# Altium PCB 8088NoteBook2.PcbDoc (part 1 of 2)
Units mm, origin at the board's own origin, x right, y up, seen from the top; angles counter-clockwise.
Board outline 60 x 75.5 mm, 4 copper layers (Top Layer, MidLayer1, GND, Bottom Layer); 109 components, 230 nets, 889 pads, 406 vias.
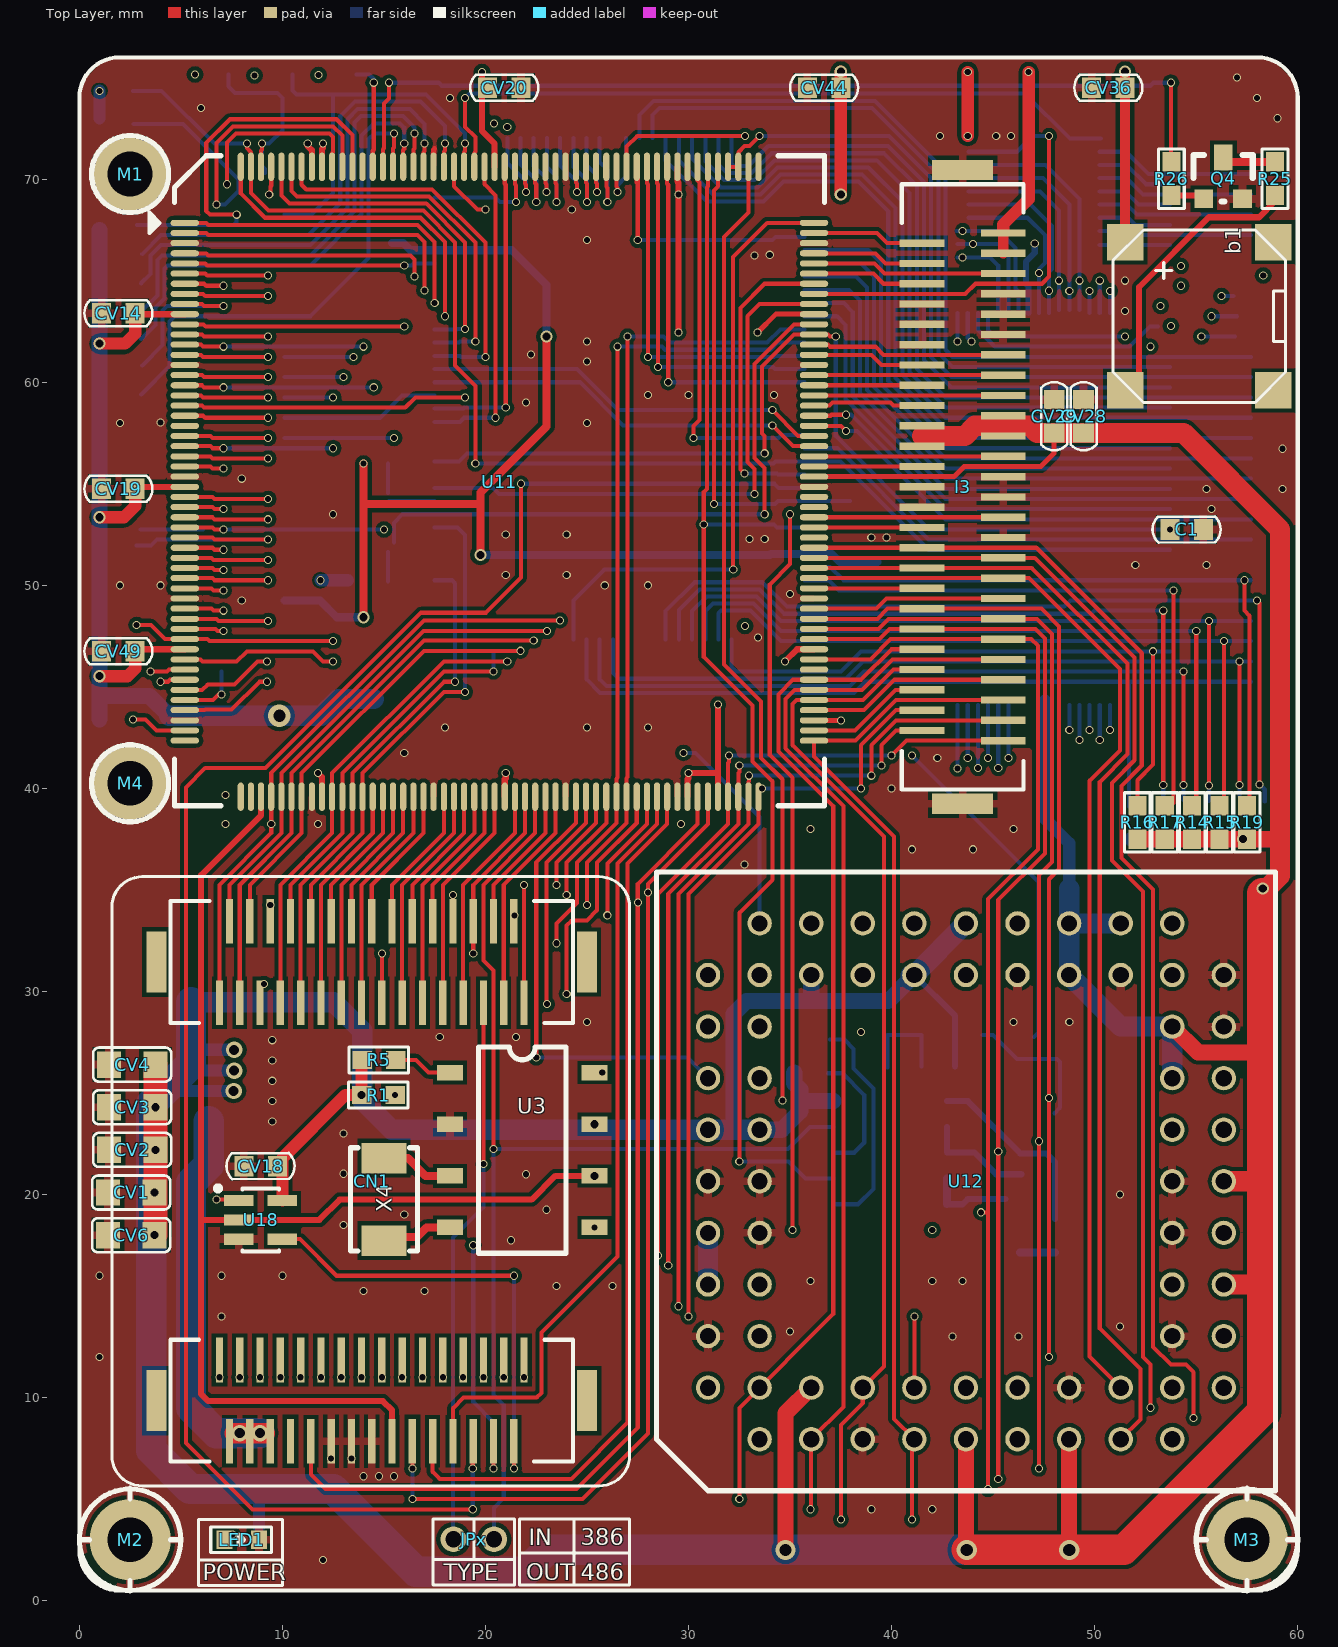
[diagram p0: Top Layer view]
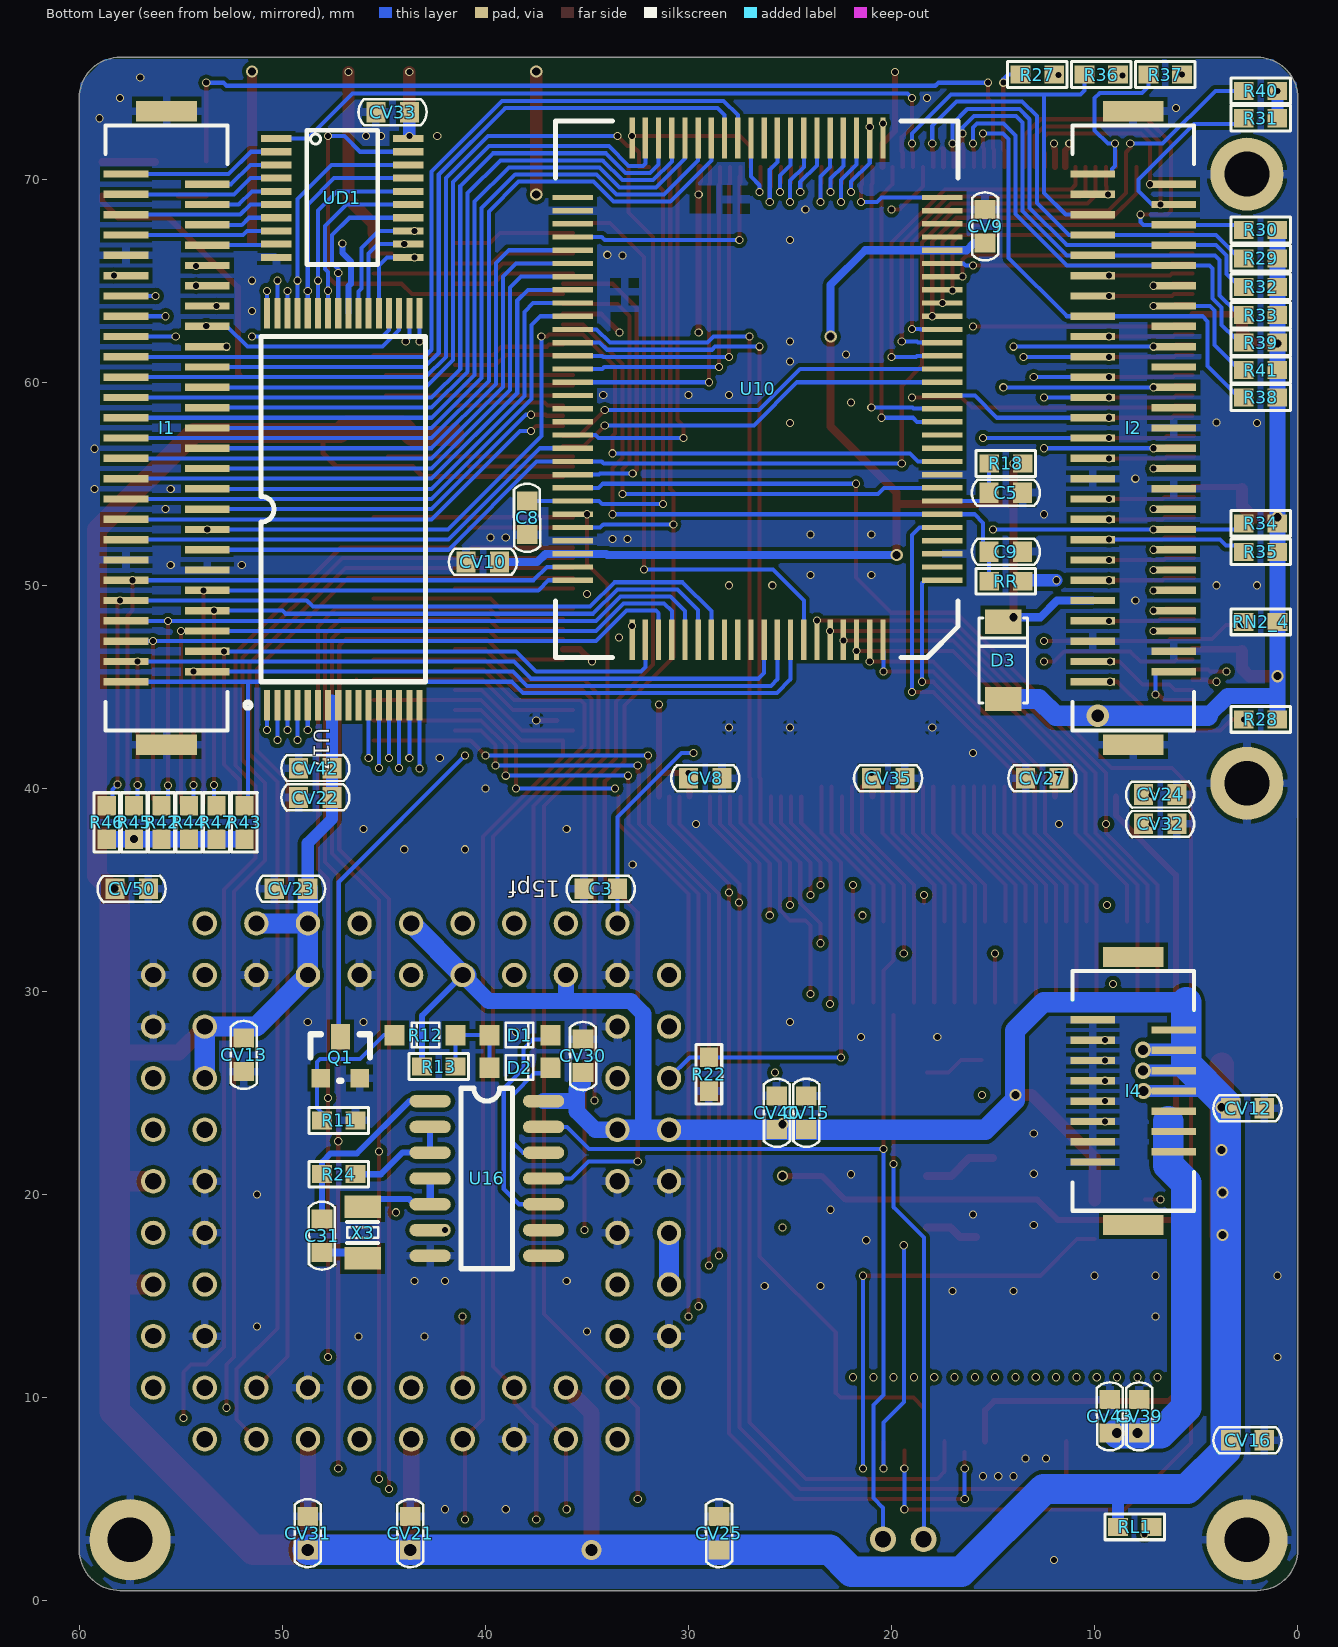
[diagram p1: Bottom Layer view, seen from below]
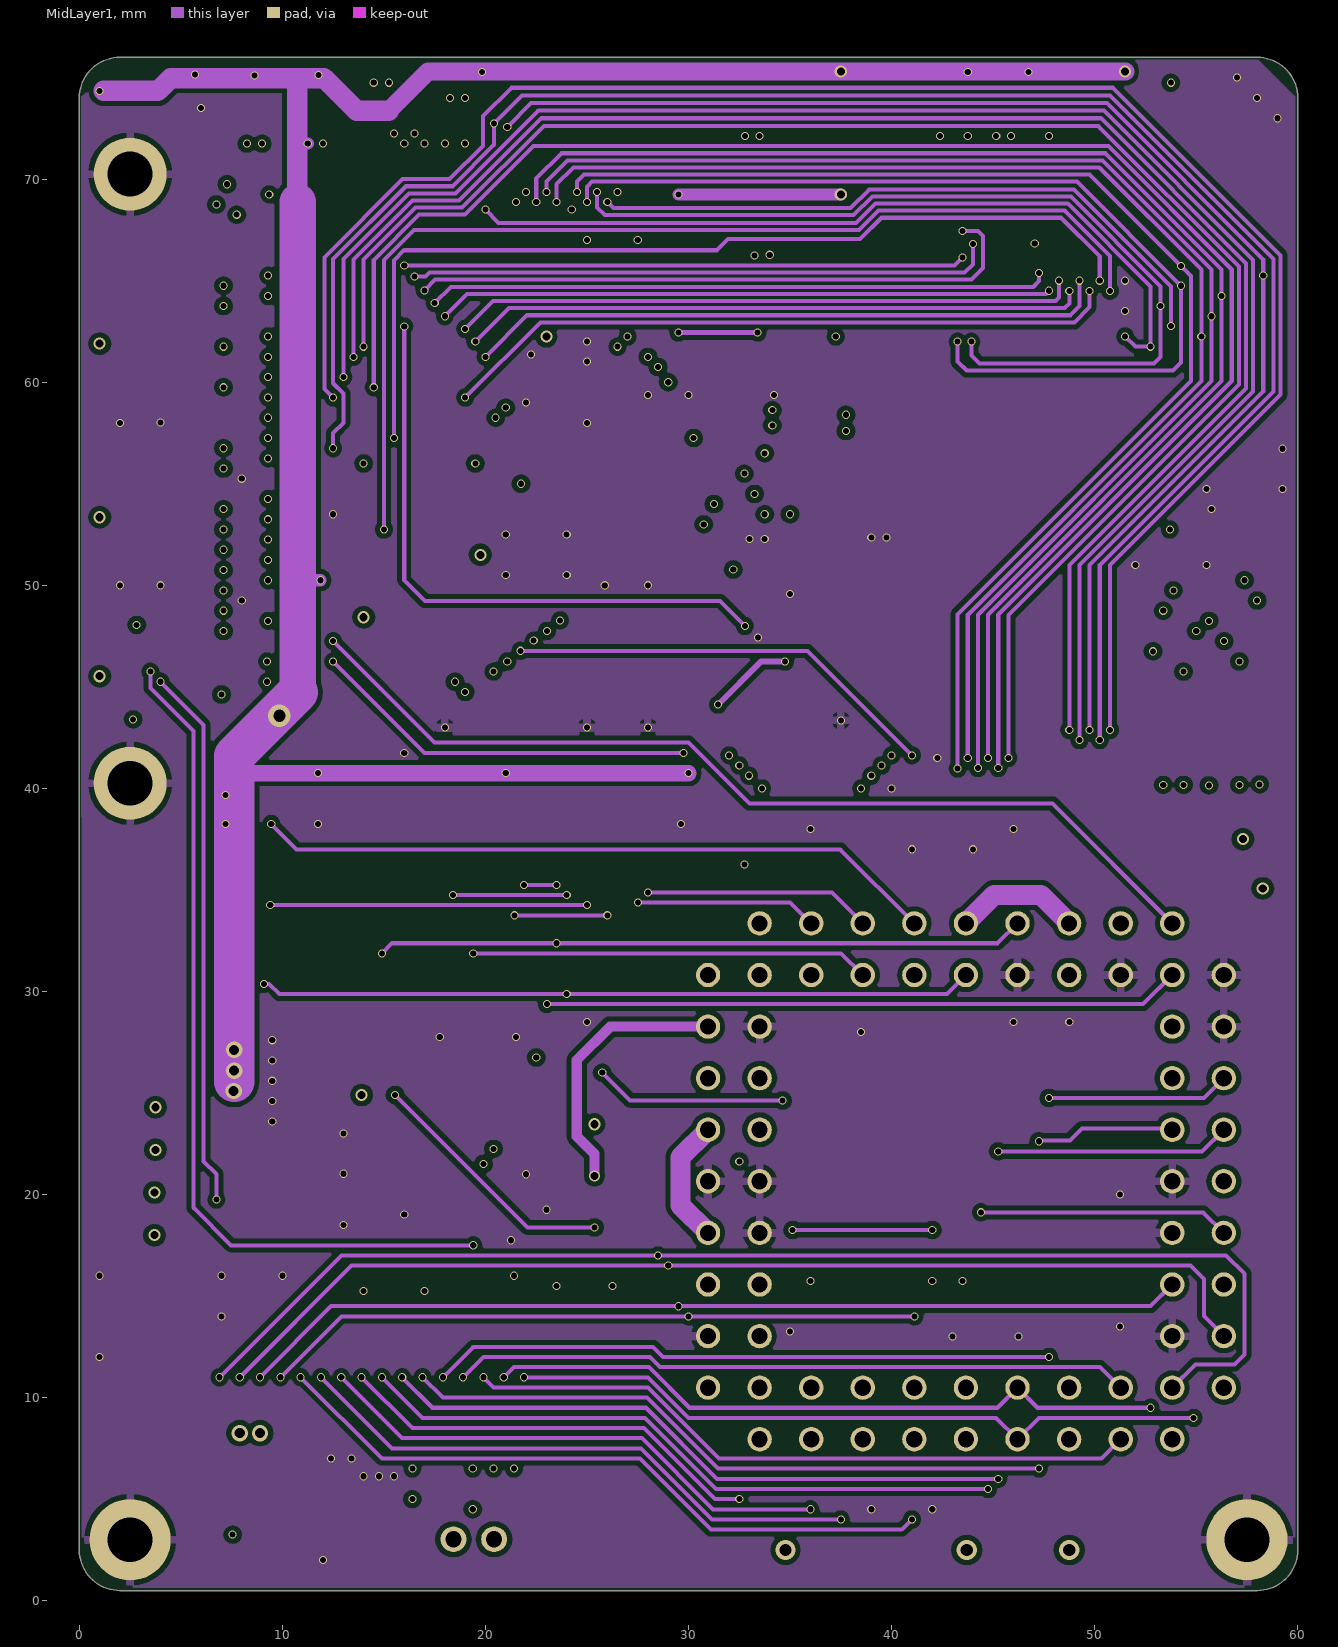
[diagram p2: MidLayer1]
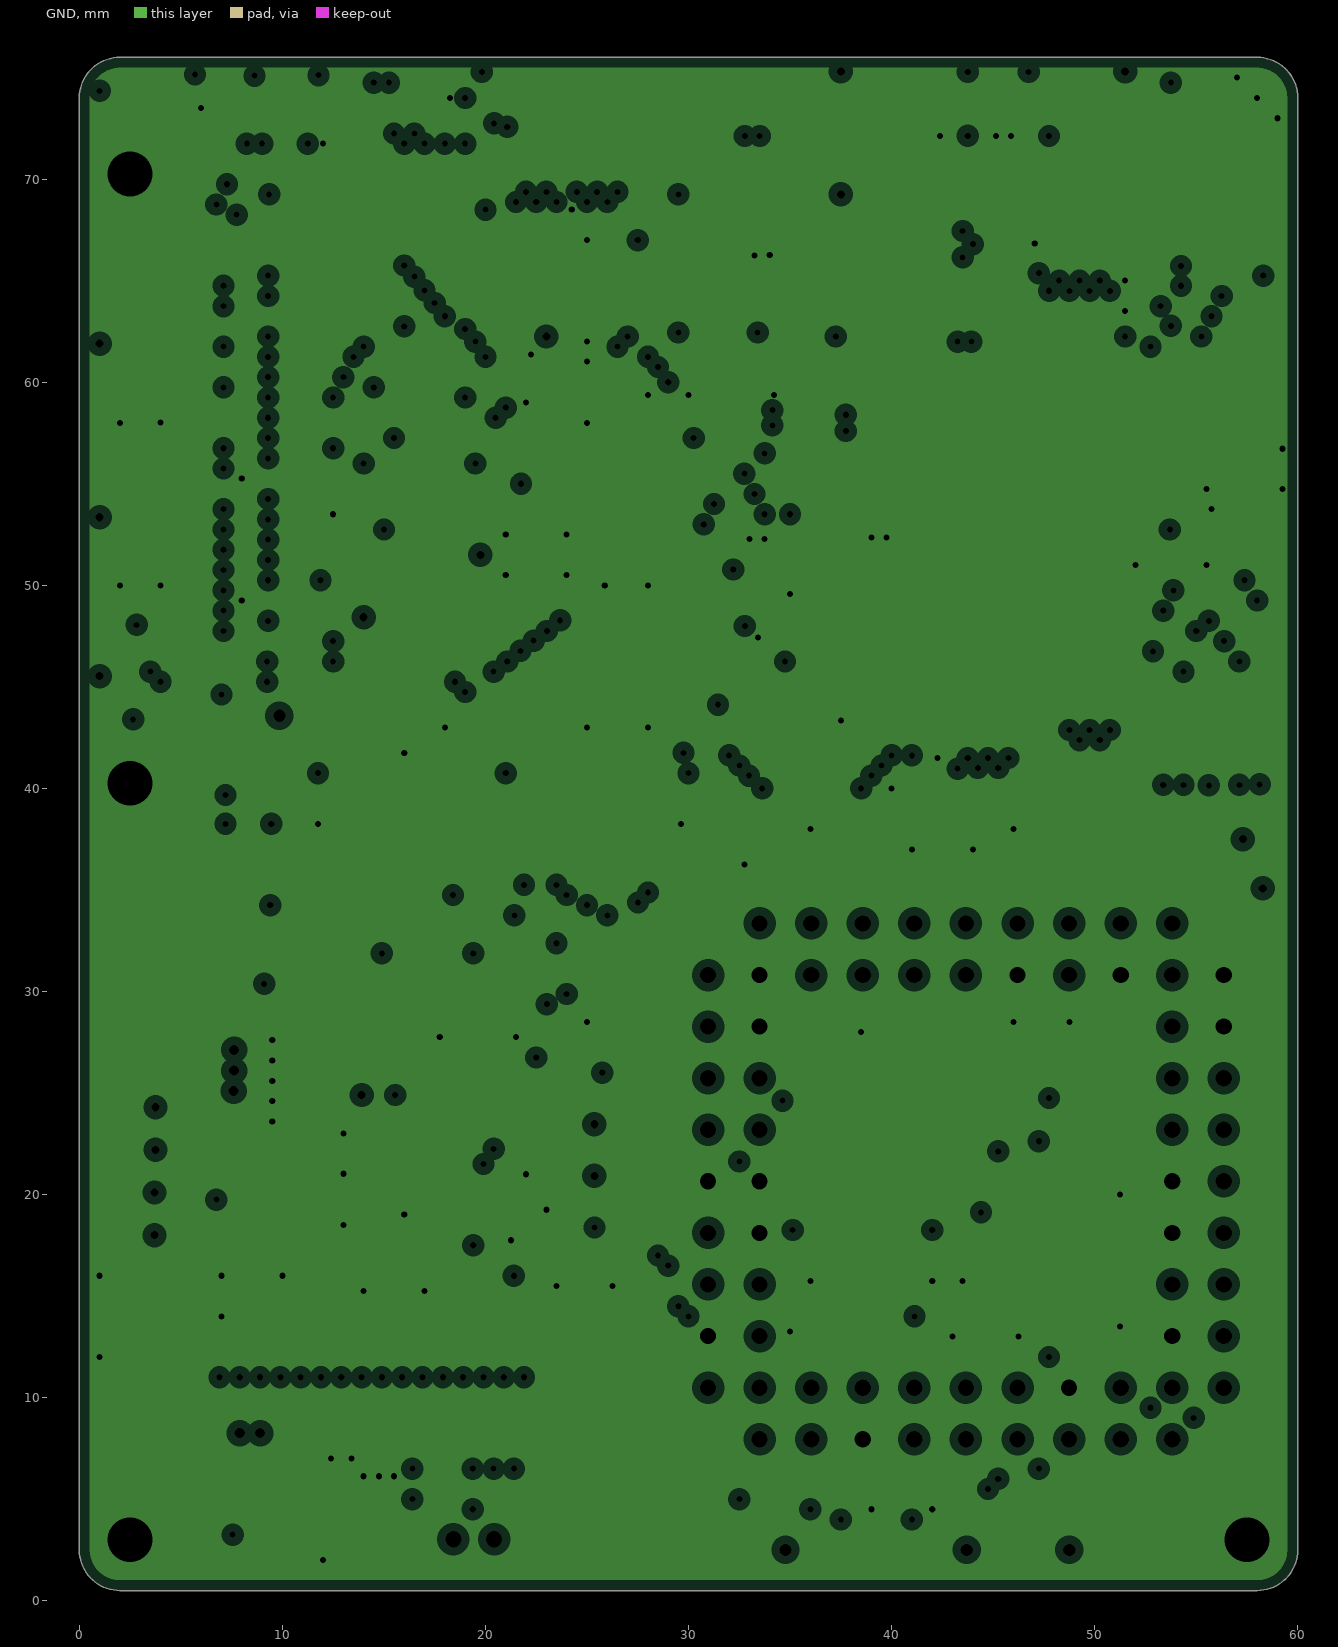
[diagram p3: GND, clearances drawn from the general rule]

## Layer stack, top to bottom
Top Layer: signal copper 0.0356
Dielectric: core 0.32, FR-4, Dk 4.8
MidLayer1: signal copper 0.0356
Dielectric: prepreg 0.32, FR-4, Dk 4.8
GND: plane copper 0.0356, net GND
Dielectric: core 0.32, FR-4, Dk 4.8
Bottom Layer: signal copper 0.0356

## Board outline
0,2.5 ccw(c2,2.5) 2,0.5 58,0.5 ccw(c58,2.5) 60,2.5 60,74 ccw(c58,74) 58,76 2,76 ccw(c2,74) 0,74

## Design rules (kind name [scope] priority, off if disabled: settings)
Clearance [All] p1: gap=0.15
ComponentClearance [All] p1: gap=0.254 collisioncheckmode=3 verticalgap=0.254
HoleSize [All] p1: absolutevalues=TRUE maxlimit=10 minlimit=0.3 maxpercent=80.000 minpercent=20.000
PlaneClearance [All] p1: clearance=0.4
PlaneConnect [All] p1: planeconnectstyle=Direct reliefexpansion=0.508 reliefentries=4 reliefconductorwidth=0.254 reliefairgap=0.254
PolygonConnect [All] p1: connectstyle=Relief reliefconductorwidth=0.4 reliefentries=4 polygonreliefangle="90 Angle"
RoutingVias [All] p1: holewidth=0.3 width=0.4 viastyle="Through Hole" minholewidth=0.3 minwidth=0.4 maxholewidth=5 maxwidth=5
SolderMaskExpansion [All] p1: expansion=0.102
TestPointUsage [All] p1: valid=0 allowmultiple=FALSE
Testpoint [All] p1: side=15 testpointundercomponent=TRUE minsize=1.016 maxsize=2.54 preferedsize=1.524 minholesize=0 maxholesize=1.016 preferedholesize=0.813 testpointgrid=0.025 style=1023 order=0123456789
Width [All] p1: maxlimit=5 minlimit=0.2 preferedwidth=0.254 toplayer_prefwidth=0.2 midlayer1_prefwidth=0.2 bottomlayer_prefwidth=0.2 minimp=50.000000 maximp=50.000000 favimp=50.000000
15 further rules are at their usual default settings.

## Components (designator, comment, footprint, x,y, rotation, side; value= is the part's Value field where it differs from the comment)
b1 "BELL" BELL_8530 59.4,67.5 r180 top
C1 "1000pf" C0603 53.7,52.75 r0 top
C3 "15pf" C0603 33.5,35.05 r0 bottom
C5 "47000pf" C0603 13.55,54.55 r0 bottom
C8 "220pf" C0603 37.95,54.15 r270 bottom
C9 "10uf" C0603 15.2,51.65 r180 bottom
C31 "5pf" C0603 48.05,18.8 r270 bottom
CN1 "386SX-1.1" MY-386SX1 21.9,29.45 r180 top
CV1 "CAP" C0805 3.7,20.1 r180 top
CV2 "CAP" C0805 3.75,22.2 r180 top
CV3 "CAP" C0805 3.75,24.3 r180 top
CV4 "CAP" C0805 3.75,26.4 r180 top
CV6 "CAP" C0805 3.7,18 r180 top
CV8 "0.1uf" C0603 30,40.5 r180 bottom
CV9 "0.1uf" C0603 15.4,66.85 r90 bottom
CV10 "0.1uf" C0603 39.3,51.15 r0 bottom
CV12 "0.1uf" C0603 3.3,24.25 r180 bottom
CV13 "0.1uf" C0603 51.9,27.7 r270 bottom
CV14 "0.1uf" C0603 2.75,63.4 r180 top
CV15 "0.1uf" C0603 24.2,23.2 r90 bottom
CV16 "0.1uf" C0603 3.3,7.9 r180 bottom
CV18 "0.1uf" C0603 9.75,21.4 r180 top
CV19 "0.1uf" C0603 2.75,54.75 r180 top
CV20 "0.1uf" C0603 20.1,74.5 r0 top
CV21 "0.1uf" C0603 43.7,2.5 r90 bottom
CV22 "0.1uf" C0603 47.55,39.55 r0 bottom
CV23 "0.1uf" C0603 48.75,35.05 r0 bottom
CV24 "0.1uf" C0603 7.6,39.7 r180 bottom
CV25 "0.1uf" C0603 28.5,2.5 r90 bottom
CV27 "0.1uf" C0603 11.75,40.5 r0 bottom
CV28 "0.1uf" C0603 49.45,57.5 r90 top
CV29 "0.1uf" C0603 48,57.5 r90 top
CV30 "0.1uf" C0603 35.2,26 r90 bottom
CV31 "0.1uf" C0603 48.75,2.5 r90 bottom
CV32 "0.1uf" C0603 7.6,38.25 r180 bottom
CV33 "0.1uf" C0603 43.75,73.3 r0 bottom
CV35 "0.1uf" C0603 21,40.5 r180 bottom
CV36 "0.1uf" C0603 51.5,74.5 r180 top
CV39 "0.1uf" C0603 7.8,8.25 r90 bottom
CV40 "0.1uf" C0603 25.65,23.2 r90 bottom
CV42 "0.1uf" C0603 47.55,41 r0 bottom
CV43 "0.1uf" C0603 9.25,8.25 r90 bottom
CV44 "0.1uf" C0603 37.5,74.5 r180 top
CV49 "0.1uf" C0603 2.75,46.75 r180 top
CV50 "0.1uf" C0603 58.25,35.05 r180 bottom
D1 "DIODE1" SOD323 39.8,27.85 r180 bottom
D2 "DIODE1" SOD323 39.8,26.25 r180 bottom
D3 "DIODE1" SMx 14.5,44 r90 bottom
I1 "CON51P" BTB1.0-51P-B 57.7,70.25 r270 bottom
I2 "CON51P" BTB1.0-51P-B 10.1,70.25 r270 bottom
I3 "CON51P" BTB1.0-51P-b 45.5,42.35 r90 top
I4 "CON15P" BTB1.0-15P-B 10.1,28.6 r270 bottom
JPx "JP" SIP2(2.0) 20.425,3.025 r180 top
LED1 "POWER" LED0603 7.15,3 r0 top
M1 "CON1" M2A 2.5,70.25 r0 top
M2 "CON1" MY-M2 2.5,3 r0 top
M3 "CON1" MY-M2 57.5,3 r0 top
M4 "CON1" M2A 2.5,40.25 r0 top
Q1 "NPN-Y1" SOT23 47.15,26.75 r180 bottom
Q4 "NPN" SOT23 56.325,70.05 r0 top
R1 "10k" R0603 15.55,24.9 r180 top
R5 "10k" R0603 15.575,26.625 r180 top
R11 "2.2k" R0603 46.4,23.65 r0 bottom
R12 "DIODE1" SOD323 41.475,27.85 r0 bottom
R13 "4.7k" R0603 43.125,26.3 r180 bottom
R14 "4.7k" R0603 54.8,37.5 r90 top
R15 "4.7k" R0603 56.15,37.5 r90 top
R16 "4.7k" R0603 52.1,37.5 r90 top
R17 "4.7k" R0603 53.45,37.5 r90 top
R18 "1k" R0603 15.2,56 r180 bottom
R19 "4.7k" R0603 57.5,37.5 r90 top
R22 "4.7k" R0603 29,25.1 r90 bottom
R24 "1M" R0603 48.05,21 r180 bottom
R25 "33" R0603 58.875,70.85 r270 top
R26 "4.7k" R0603 53.775,69.2 r90 top
R27 "4.7k" R0603 12,75.15 r0 bottom
R28 "4.7k" R0603 1,43.4 r0 bottom
R29 "4.7k" R0603 1,66.1 r0 bottom
R30 "4.7k" R0603 1,67.5 r0 bottom
R31 "4.7k" R0603 1,73 r0 bottom
R32 "4.7k" R0603 1,64.7 r0 bottom
R33 "4.7k" R0603 1,63.3 r0 bottom
R34 "4.7k" R0603 1,53.05 r0 bottom
R35 "4.7k" R0603 1,51.65 r0 bottom
R36 "4.7k" R0603 8.85,75.15 r0 bottom
R37 "4.7k" R0603 5.7,75.15 r0 bottom
R38 "4.7k" R0603 1,59.25 r0 bottom
R39 "4.7k" R0603 1,61.95 r0 bottom
R40 "4.7k" R0603 1,74.35 r0 bottom
R41 "4.7k" R0603 1,60.6 r0 bottom
R42 "4.7k" R0603 55.95,37.5 r90 bottom
R43 "4.7k" R0603 51.875,37.5 r90 bottom
R44 "4.7k" R0603 54.6,37.5 r90 bottom
R45 "4.7k" R0603 57.3,37.5 r90 bottom
R46 "4.7k" R0603 58.65,37.5 r90 bottom
R47 "4.7k" R0603 53.25,37.5 r90 bottom
RL1 "1k" R0603 7.2,3.635 r0 bottom
RN2_4 "4.7k" R0603 2.65,48.2 r180 bottom
RR "10K" R0603 15.2,50.2 r180 bottom
U3 "CH9007A" "DIP8 - SOJ" 18,26 r0 top
U10 "82C206" PQFP100B 17.5,50.25 r90 bottom
U11 "ALD93C308" QFP208 5.7,67.85 r270 top
U12 "387SX" PLCC68 33.5,7.95 r90 top
U16 "74LS14" SO-14 42.725,24.6 r180 bottom
U17 "29C512_TSSOP" TSSOP32 50.75,44.1 r90 bottom
U18 "74LVC1G79DBVR" SOT23-5 7.85,19.7 r270 top
UD1 "74LS245" TSSOP-20 50.3,72 r180 bottom
X3 "32768kHZ" CRY3215A 46.05,19.4 r270 bottom
X4 "14.31818" 5032 13.35,22.3 r270 top

## Footprints (in the part's own frame and the unit in brackets; to place one, negate y for a bottom-side part, rotate by r counter-clockwise, add the part's x,y. Pads: shape width x height; smd on the part's side, far side on the other; paste and mask are expansions set on the pad)
5032 [mm]
  rect 1.5x2.2 smd: 1(0.508,1.651) 2(4.572,1.651)
  silkscreen extent 0,0 5.08,3.3
BELL_8530 [mm]
  rect 1.8x1.8 smd: 1(7.9,0.6) 2(7.9,7.9) 3(0.6,7.9) 4(0.6,0.6)
  silkscreen extent 0,0 8.5,8.5
BTB1.0-15P-B [mm]
  rect 1x3 smd: 0(-3.1,2) 0(10.1,2)
  rect 0.36x2.2 smd: 1(0,0) 2(1,0) 3(2,0) 4(3,0) 5(4,0) 6(5,0) 7(6,0) 8(7,0) 9(6.5,4) 10(5.5,4) 11(4.5,4) 12(3.5,4) 13(2.5,4) 14(1.5,4) 15(0.5,4)
  silkscreen extent -2.4,-1 9.4,5
BTB1.0-51P-B [mm]
  rect 1x3 smd: 0(-3.1,2) 0(28.1,2)
  rect 0.36x2.2 smd: 1(0,0) 2(1,0) 3(2,0) 4(3,0) 5(4,0) 6(5,0) 7(6,0) 8(7,0) 9(8,0) 10(9,0) 11(10,0) 12(11,0) 13(12,0) 14(13,0) 15(14,0) 16(15,0) 17(16,0) 18(17,0) 19(18,0) 20(19,0) 21(20,0) 22(21,0) 23(22,0) 24(23,0) 25(24,0) 26(25,0) 27(24.5,4) 28(23.5,4) 29(22.5,4) 30(21.5,4) 31(20.5,4) 32(19.5,4) 33(18.5,4) 34(17.5,4) 35(16.5,4) 36(15.5,4) 37(14.5,4) 38(13.5,4) 39(12.5,4) 40(11.5,4) 41(10.5,4) 42(9.5,4) 43(8.5,4) 44(7.5,4) 45(6.5,4) 46(5.5,4) 47(4.5,4) 48(3.5,4) 49(2.5,4) 50(1.5,4) 51(0.5,4)
  silkscreen extent -2.4,-1 27.4,5
BTB1.0-51P-b [mm]
  rect 1x3 smd: 0(-3.1,2) 0(28.1,2)
  rect 0.36x2.2 smd: 1(0,0) 2(1,0) 3(2,0) 4(3,0) 5(4,0) 6(5,0) 7(6,0) 8(7,0) 9(8,0) 10(9,0) 11(10,0) 12(11,0) 13(12,0) 14(13,0) 15(14,0) 16(15,0) 17(16,0) 18(17,0) 19(18,0) 20(19,0) 21(20,0) 22(21,0) 23(22,0) 24(23,0) 25(24,0) 26(25,0) 27(24.5,4) 28(23.5,4) 29(22.5,4) 30(21.5,4) 31(20.5,4) 32(19.5,4) 33(18.5,4) 34(17.5,4) 35(16.5,4) 36(15.5,4) 37(14.5,4) 38(13.5,4) 39(12.5,4) 40(11.5,4) 41(10.5,4) 42(9.5,4) 43(8.5,4) 44(7.5,4) 45(6.5,4) 46(5.5,4) 47(4.5,4) 48(3.5,4) 49(2.5,4) 50(1.5,4) 51(0.5,4)
  silkscreen extent -2.4,-1 27.4,5
C0603 [mil]
  rect 37.01x40 smd: 1(0,0)
  rect 37x40 smd: 2(64.98,0)
  silkscreen extent -34,-25 98,25
C0805 [mm]
  rect 1.2x1.3 smd: 1(0,0) 2(2.286,0)
  silkscreen extent -0.78,-0.84 3.07,0.84
CRY3215A [mm]
  rect 1.1x1.8 smd: 1(0,0) 2(2.54,0)
  silkscreen extent 0.76,-0.76 1.78,0.76
"DIP8 - SOJ" [mil]
  rect 50x30 smd: 1(10,0) 2(10,-100) 3(10,-200) 4(10,-300) 5(290,-300) 6(290,-200) 7(290,-100) 8(290,0)
  silkscreen extent 65,-350 235,50
LED0603 [mm]
  rect 0.8x0.9 smd: 1(0,0) 2(1.7,0)
  silkscreen extent -0.68,-0.64 2.32,0.64
M2A [mm]
  round 3.6 hole 2.2: 1(0,0)
  silkscreen extent -1.9,-1.9 1.9,1.9
MY-386SX1 [mm]
  rect 1x3 smd: 0(-3.1,19.6) 0(-3.1,-2) 0(18.1,19.6) 0(18.1,-2)
  rect 0.36x2.2 smd: 1(0,17.6) 2(1,17.6) 3(2,17.6) 4(3,17.6) 5(4,17.6) 6(5,17.6) 7(6,17.6) 8(7,17.6) 9(8,17.6) 10(9,17.6) 11(10,17.6) 12(11,17.6) 13(12,17.6) 14(13,17.6) 15(14,17.6) 16(15,17.6) 17(14.5,21.6) 18(13.5,21.6) 19(12.5,21.6) 20(11.5,21.6) 21(10.5,21.6) 22(9.5,21.6) 23(8.5,21.6) 24(7.5,21.6) 25(6.5,21.6) 26(5.5,21.6) 27(4.5,21.6) 28(3.5,21.6) 29(2.5,21.6) 30(1.5,21.6) 31(0.5,21.6) A1(15,0) A2(14,0) A3(13,0) A4(12,0) A5(11,0) A6(10,0) A7(9,0) A8(8,0) A9(7,0) A10(6,0) A11(5,0) A12(4,0) A13(3,0) A14(2,0) A15(1,0) A16(0,0) A17(0.5,-4) A18(1.5,-4) A19(2.5,-4) A20(3.5,-4) A21(4.5,-4) A22(5.5,-4) A23(6.5,-4) A24(7.5,-4) A25(8.5,-4) A26(9.5,-4) A27(10.5,-4) A28(11.5,-4) A29(12.5,-4) A30(13.5,-4) A31(14.5,-4)
  silkscreen extent -5.2,-6.2 20.3,23.8
MY-M2 [mm]
  round 4 hole 2.2: 1(0,0)
  silkscreen extent -2.5,-2.51 2.5,2.53
PLCC68 [mm]
  round 1.2 hole 0.8: 1(0,0) 2(2.54,0) 3(0,-2.54) 4(2.54,-2.54) 5(0,-5.08) 6(2.54,-5.08) 7(0,-7.62) 8(2.54,-7.62) 9(0,-10.16) 10(2.54,-10.16) 11(0,-12.7) 12(2.54,-12.7) 13(0,-15.24) 14(2.54,-15.24) 15(0,-17.78) 16(2.54,-17.78) 17(0,-20.32) 18(2.54,-22.86) 19(2.54,-20.32) 20(5.08,-22.86) 21(5.08,-20.32) 22(7.62,-22.86) 23(7.62,-20.32) 24(10.16,-22.86) 25(10.16,-20.32) 26(12.7,-22.86) 27(12.7,-20.32) 28(15.24,-22.86) 29(15.24,-20.32) 30(17.78,-22.86) 31(17.78,-20.32) 32(20.32,-22.86) 33(20.32,-20.32) 34(22.86,-22.86) 35(25.4,-20.32) 36(22.86,-20.32) 37(25.4,-17.78) 38(22.86,-17.78) 39(25.4,-15.24) 40(22.86,-15.24) 41(25.4,-12.7) 42(22.86,-12.7) 43(25.4,-10.16) 44(22.86,-10.16) 45(25.4,-7.62) 46(22.86,-7.62) 47(25.4,-5.08) 48(22.86,-5.08) 49(25.4,-2.54) 50(22.86,-2.54) 51(25.4,0) 52(22.86,2.54) 53(22.86,0) 54(20.32,2.54) 55(20.32,0) 56(17.78,2.54) 57(17.78,0) 58(15.24,2.54) 59(15.24,0) 60(12.7,2.54) 61(12.7,0) 62(10.16,2.54) 63(10.16,0) 64(7.62,2.54) 65(7.62,0) 66(5.08,2.54) 67(5.08,0) 68(2.54,2.54)
  silkscreen extent -2.54,-25.4 27.94,5.08
PQFP100B [mm]
  rect 0.26x2 smd: 1(0,0) 2(0.65,0) 3(1.3,0) 4(1.95,0) 5(2.6,0) 6(3.25,0) 7(3.9,0) 8(4.55,0) 9(5.2,0) 10(5.85,0) 11(6.5,0) 12(7.15,0) 13(7.8,0) 14(8.45,0) 15(9.1,0) 16(9.75,0) 17(10.4,0) 18(11.05,0) 19(11.7,0) 20(12.35,0) 21(13,0) 22(13.65,0) 23(14.3,0) 24(14.95,0) 25(15.6,0) 26(16.25,0) 27(16.9,0) 28(17.55,0) 29(18.2,0) 30(18.85,0) 51(18.85,18.2) 52(18.2,18.2) 53(17.55,18.2) 54(16.9,18.2) 55(16.25,18.2) 56(15.6,18.2) 57(14.95,18.2) 58(14.3,18.2) 59(13.65,18.2) 60(13,18.2) 61(12.35,18.2) 62(11.7,18.2) 63(11.05,18.2) 64(10.4,18.2) 65(9.75,18.2) 66(9.1,18.2) 67(8.45,18.2) 68(7.8,18.2) 69(7.15,18.2) 70(6.5,18.2) 71(5.85,18.2) 72(5.2,18.2) 73(4.55,18.2) 74(3.9,18.2) 75(3.25,18.2) 76(2.6,18.2) 77(1.95,18.2) 78(1.3,18.2) 79(0.65,18.2) 80(0,18.2)
  rect 2x0.26 smd: 31(21.775,2.925) 32(21.775,3.575) 33(21.775,4.225) 34(21.775,4.875) 35(21.775,5.525) 36(21.775,6.175) 37(21.775,6.825) 38(21.775,7.475) 39(21.775,8.125) 40(21.775,8.775) 41(21.775,9.425) 42(21.775,10.075) 43(21.775,10.725) 44(21.775,11.375) 45(21.775,12.025) 46(21.775,12.675) 47(21.775,13.325) 48(21.775,13.975) 49(21.775,14.625) 50(21.775,15.275) 81(-2.925,15.275) 82(-2.925,14.625) 83(-2.925,13.975) 84(-2.925,13.325) 85(-2.925,12.675) 86(-2.925,12.025) 87(-2.925,11.375) 88(-2.925,10.725) 89(-2.925,10.075) 90(-2.925,9.425) 91(-2.925,8.775) 92(-2.925,8.125) 93(-2.925,7.475) 94(-2.925,6.825) 95(-2.925,6.175) 96(-2.925,5.525) 97(-2.925,4.875) 98(-2.925,4.225) 99(-2.925,3.575) 100(-2.925,2.925)
  silkscreen extent -3.81,-0.76 22.61,19.05
QFP208 [mm]
  oval 0.3x1.4 smd: 1(0,-0.508) 2(0.5,-0.508) 3(1,-0.508) 4(1.5,-0.508) 5(2,-0.508) 6(2.5,-0.508) 7(3,-0.508) 8(3.5,-0.508) 9(4,-0.508) 10(4.5,-0.508) 11(5,-0.508) 12(5.5,-0.508) 13(6,-0.508) 14(6.5,-0.508) 15(7,-0.508) 16(7.5,-0.508) 17(8,-0.508) 18(8.5,-0.508) 19(9,-0.508) 20(9.5,-0.508) 21(10,-0.508) 22(10.5,-0.508) 23(11,-0.508) 24(11.5,-0.508) 25(12,-0.508) 26(12.5,-0.508) 27(13,-0.508) 28(13.5,-0.508) 29(14,-0.508) 30(14.5,-0.508) 31(15,-0.508) 32(15.5,-0.508) 33(16,-0.508) 34(16.5,-0.508) 35(17,-0.508) 36(17.5,-0.508) 37(18,-0.508) 38(18.5,-0.508) 39(19,-0.508) 40(19.5,-0.508) 41(20,-0.508) 42(20.5,-0.508) 43(21,-0.508) 44(21.5,-0.508) 45(22,-0.508) 46(22.5,-0.508) 47(23,-0.508) 48(23.5,-0.508) 49(24,-0.508) 50(24.5,-0.508) 51(25,-0.508) 52(25.5,-0.508) 105(25.5,30.48) 106(25,30.48) 107(24.5,30.48) 108(24,30.48) 109(23.5,30.48) 110(23,30.48) 111(22.5,30.48) 112(22,30.48) 113(21.5,30.48) 114(21,30.48) 115(20.5,30.48) 116(20,30.48) 117(19.5,30.48) 118(19,30.48) 119(18.5,30.48) 120(18,30.48) 121(17.5,30.48) 122(17,30.48) 123(16.5,30.48) 124(16,30.48) 125(15.5,30.48) 126(15,30.48) 127(14.5,30.48) 128(14,30.48) 129(13.5,30.48) 130(13,30.48) 131(12.5,30.48) 132(12,30.48) 133(11.5,30.48) 134(11,30.48) 135(10.5,30.48) 136(10,30.48) 137(9.5,30.48) 138(9,30.48) 139(8.5,30.48) 140(8,30.48) 141(7.5,30.48) 142(7,30.48) 143(6.5,30.48) 144(6,30.48) 145(5.5,30.48) 146(5,30.48) 147(4.5,30.48) 148(4,30.48) 149(3.5,30.48) 150(3,30.48) 151(2.5,30.48) 152(2,30.48) 153(1.5,30.48) 154(1,30.48) 155(0.5,30.48) 156(0,30.48)
  oval 1.4x0.3 smd: 53(28.258,2.25) 54(28.258,2.75) 55(28.258,3.25) 56(28.258,3.75) 57(28.258,4.25) 58(28.258,4.75) 59(28.258,5.25) 60(28.258,5.75) 61(28.258,6.25) 62(28.258,6.75) 63(28.258,7.25) 64(28.258,7.75) 65(28.258,8.25) 66(28.258,8.75) 67(28.258,9.25) 68(28.258,9.75) 69(28.258,10.25) 70(28.258,10.75) 71(28.258,11.25) 72(28.258,11.75) 73(28.258,12.25) 74(28.258,12.75) 75(28.258,13.25) 76(28.258,13.75) 77(28.258,14.25) 78(28.258,14.75) 79(28.258,15.25) 80(28.258,15.75) 81(28.258,16.25) 82(28.258,16.75) 83(28.258,17.25) 84(28.258,17.75) 85(28.258,18.25) 86(28.258,18.75) 87(28.258,19.25) 88(28.258,19.75) 89(28.258,20.25) 90(28.258,20.75) 91(28.258,21.25) 92(28.258,21.75) 93(28.258,22.25) 94(28.258,22.75) 95(28.258,23.25) 96(28.258,23.75) 97(28.258,24.25) 98(28.258,24.75) 99(28.258,25.25) 100(28.258,25.75) 101(28.258,26.25) 102(28.258,26.75) 103(28.258,27.25) 104(28.258,27.75) 157(-2.758,27.75) 158(-2.758,27.25) 159(-2.758,26.75) 160(-2.758,26.25) 161(-2.758,25.75) 162(-2.758,25.25) 163(-2.758,24.75) 164(-2.758,24.25) 165(-2.758,23.75) 166(-2.758,23.25) 167(-2.758,22.75) 168(-2.758,22.25) 169(-2.758,21.75) 170(-2.758,21.25) 171(-2.758,20.75) 172(-2.758,20.25) 173(-2.758,19.75) 174(-2.758,19.25) 175(-2.758,18.75) 176(-2.758,18.25) 177(-2.758,17.75) 178(-2.758,17.25) 179(-2.758,16.75) 180(-2.758,16.25) 181(-2.758,15.75) 182(-2.758,15.25) 183(-2.758,14.75) 184(-2.758,14.25) 185(-2.758,13.75) 186(-2.758,13.25) 187(-2.758,12.75) 188(-2.758,12.25) 189(-2.758,11.75) 190(-2.758,11.25) 191(-2.758,10.75) 192(-2.758,10.25) 193(-2.758,9.75) 194(-2.758,9.25) 195(-2.758,8.75) 196(-2.758,8.25) 197(-2.758,7.75) 198(-2.758,7.25) 199(-2.758,6.75) 200(-2.758,6.25) 201(-2.758,5.75) 202(-2.758,5.25) 203(-2.758,4.75) 204(-2.758,4.25) 205(-2.758,3.75) 206(-2.758,3.25) 207(-2.758,2.75) 208(-2.758,2.25)
  silkscreen extent -3.3,-2.25 28.7,30.99
R0603 [mil]
  rect 38x35 smd: 1(0,0) 2(65,0)
  silkscreen extent -25,-25 90,25
SIP2(2.0) [mm]
  round 1.27 hole 0.8: 1(0,0) 2(2,0)
  silkscreen extent -1,-1 3,1
SMx [mm]
  rect 1.2x1.8 smd: A(0.4,0) K(4.2,0)
  silkscreen extent 0.2,-1.2 4.4,1.2
SO-14 [mil]
  oval 80x24 smd: 1(0,0) 2(0,-50) 3(0,-100) 4(0,-150) 5(0,-200) 6(0,-250) 7(0,-300) 8(220,-300) 9(220,-250) 10(220,-200) 11(220,-150) 12(220,-100) 13(220,-50) 14(220,0)
  silkscreen extent 60,-325 160,25
SOD323 [mm]
  rect 1x1 smd: A(0,0) K(3,0)
  silkscreen extent 0.8,-0.6 2.15,0.6
SOT23 [mil]
  rect 36x36 smd: B(-37.5,-40) E(37.5,-40)
  rect 36x50 smd: C(0.5,40)
  silkscreen extent -58,-45 58,45
SOT23-5 [mm]
  rect 0.55x1.45 smd: 1(0,0) 2(0.95,0) 3(1.9,0) 4(1.9,2.15) 5(0,2.15)
  silkscreen extent -0.72,-1.15 2.5,1.98
TSSOP32 [mm]
  rect 1.5x0.3 smd: 1(0,0) 2(0,-0.5) 3(0,-1) 4(0,-1.5) 5(0,-2) 6(0,-2.5) 7(0,-3) 8(0,-3.5) 9(0,-4) 10(0,-4.5) 11(0,-5) 12(0,-5.5) 13(0,-6) 14(0,-6.5) 15(0,-7) 16(0,-7.5) 17(19.3,-7.5) 18(19.3,-7) 19(19.3,-6.5) 20(19.3,-6) 21(19.3,-5.5) 22(19.3,-5) 23(19.3,-4.5) 24(19.3,-4) 25(19.3,-3.5) 26(19.3,-3) 27(19.3,-2.5) 28(19.3,-2) 29(19.3,-1.5) 30(19.3,-1) 31(19.3,-0.5) 32(19.3,0)
  silkscreen extent -0.15,-7.8 18.15,1.1
TSSOP-20 [mm]
  rect 1.5x0.35 smd: 1(0,0) 2(0,-0.65) 3(0,-1.3) 4(0,-1.95) 5(0,-2.6) 6(0,-3.25) 7(0,-3.9) 8(0,-4.55) 9(0,-5.2) 10(0,-5.85) 11(6.5,-5.85) 12(6.5,-5.2) 13(6.5,-4.55) 14(6.5,-3.9) 15(6.5,-3.25) 16(6.5,-2.6) 17(6.5,-1.95) 18(6.5,-1.3) 19(6.5,-0.65) 20(6.5,0)
  silkscreen extent 1.5,-6.2 5,0.4

## Part data
C1 C3 C5 C8 C9 C31 CV8 CV9 CV10 CV12 CV13 CV14 CV15 CV16 CV18 CV19 CV20 CV21 CV22 CV23 CV24 CV25 CV27 CV28 CV29 CV30 CV31 CV32 CV33 CV35 CV36 CV39 CV40 CV42 CV43 CV44 CV49 CV50: library part CAP
CN1: library part CON31P
JPx: library part JP-2
LED1: library part LED
Q1: library part NPN
R1 R5 R11 R13 R14 R15 R16 R17 R18 R19 R22 R24 R25 R26 R27 R28 R29 R30 R31 R32 R33 R34 R35 R36 R37 R38 R39 R40 R41 R42 R43 R44 R45 R46 R47 RL1 RN2_4 RR: library part RES2
U17: library part 27C512
X3 X4: library part CRYSTAL

## Via types
v1: diameter 0.4, hole 0.3, Top Layer to Bottom Layer, 379 vias
v2: diameter 0.6, hole 0.4, Top Layer to Bottom Layer, 17 vias
v3: diameter 0.8, hole 0.5, Top Layer to Bottom Layer, 5 vias
v4: diameter 1, hole 0.6, Top Layer to Bottom Layer, 3 vias
v5: diameter 1.1, hole 0.6, Top Layer to Bottom Layer, 1 vias
v6: diameter 0.55, hole 0.4, Top Layer to Bottom Layer, 1 vias

## Nets (pads, with @x,y where several pads share a name; then routed paths per layer and width w, separated by ;. In a path a pad name is that pad's centre, name@x,y a point inside that pad or via, vN(x,y) a via of type N, cw(c..) or ccw(c..) an arc to the next point about the centre after c; other vN are vias at no path point)
80MCLK: CN1.25 U3.6 U11.55 U12.54 U18.2 | length 75.4
  Top Layer w0.3: 6,18.75 11.825,18.75 12.825,19.75 22.275,19.75 23.445,20.92 v6(25.366,20.92) ; U11.55@8.95,39.592 8.95,38.675 6,35.725 6,10.175 6.35,9.825 14.95,9.825 15.4,9.375 CN1.25@15.4,7.85
  MidLayer1 w0.508: v6(25.366,20.92) 25.366,22.009 24.5,22.875 24.5,26.625 26.145,28.27 U12.54@30.96,28.27
87_*BUSY: U11.87 U12.36 | length 42.4
  Top Layer w0.2: v1@23,29.375 23,36.35 24.95,38.3 U11.87@24.95,39.592
  MidLayer1 w0.2: v1@23,29.375 52.385,29.375 U12.36@53.82,30.81
  other v1: 23.025,29.375
87_*ERROR: RN2_4.1 U11.42 U12.35 | length 57.1
  Top Layer w0.2: v1(2.825,48.05) 3.525,48.05 4.225,47.35 6.3,47.35 6.4,47.25 v1(12.5,47.25)
  MidLayer1 w0.2: v1(12.5,47.25) 17.5,42.25 30,42.25 33,39.25 47.92,39.25 U12.35@53.82,33.35
87_PEREQ: R22.2 U11.86 U12.56 | length 22.5
  Top Layer w0.2: v1(22.5,26.75) 22.5,36.35 24.45,38.3 U11.86@24.45,39.592
  Bottom Layer w0.2: v1(22.5,26.75) 29.94,26.75 U12.56@30.96,25.73
87_RESET: C3.1 U11.44 U12.51 | length 37.3
  Top Layer w0.2: U11.44@5.192,46.35 5.975,46.35 6.075,46.25 7.75,46.25 8.25,46.75 11.5,46.75 12,46.25 v1(12.5,46.25)
  MidLayer1 w0.2: v1(12.5,46.25) 17,41.75 v1(29.75,41.75) ; U12.51@33.4,33.25 U12.51@33.5,33.35
  Bottom Layer w0.2: v1(29.75,41.75) 30.35,41.75 33.5,38.6 U12.51@33.5,33.35
206_*ACK/MSE: U10.30 U11.181 | length 5.8
  Top Layer w0.2: U11.181@21.45,70.608 21.45,69.75 21.5,69.7 v1(21.5,68.875)
  Bottom Layer w0.2: U10.30@17.5,69.1 20.5,69.1 20.725,68.875 v1(21.5,68.875)
206_*AEN8: U10.63 U11.168 | length 17.1
  Top Layer w0.2: U11.168@27.95,70.608 27.95,69.8 28,69.75 v1(28,61.25)
  Bottom Layer w0.2: v1(28,61.25) 34.2,61.25 34.25,61.3 U10.63@35.7,61.3
206_*AEN16: U10.64 U11.167 | length 17.1
  Top Layer w0.2: U11.167@28.45,70.608 28.45,69.8 28.5,69.75 v1(28.5,60.75)
  Bottom Layer w0.2: v1(28.5,60.75) 34.15,60.75 34.25,60.65 U10.64@35.7,60.65
206_*INTA: U10.8 U11.148 | length 28.3
  Top Layer w0.2: v1(33.25,54.5) 33.25,55.725 32.9,56.075 32.9,63.25 33.5,63.85 U11.148@36.18,63.85
  Bottom Layer w0.2: U10.8@17.5,54.8 20.375,54.8 20.675,54.5 v1(33.25,54.5)
206_*PSRSTB: C5.2 R18.1 U10.7 | length 3.7
  Bottom Layer w0.2: C5.2@15.201,54.55 R18.1@15.2,56 ; C5.2@15.25,54.15 U10.7@17.5,54.15
206_*XIOR: U10.54 U11.169 | length 12.5
  Top Layer w0.2: U11.169@27.45,70.608 27.45,69.825 27.5,70.125 v1(27.5,67)
  Bottom Layer w0.2: v1(27.5,67) 34.125,67 34.275,67.15 U10.54@35.7,67.15
206_*XIOW: U10.50 U11.170 | length 7
  Top Layer w0.2: U11.170@26.95,70.608 26.95,71.6 27.475,72.125 v1(32.775,72.125)
206_A0: U10.41 U11.171 | length 4.1
  Top Layer w0.2: U11.171@26.45,70.608 26.45,69.625 26.5,69.575 v1(26.5,69.375)
  Bottom Layer w0.2: v1(26.5,69.375) 26.5,69.7 26.925,70.125 U10.41@26.925,72.025
206_ADSTB8: U10.69 U11.163 | length 19.1
  Top Layer w0.2: v1(30.25,57.25) 30.25,57.85 30.55,58.15 30.55,69.825 30.45,69.925 U11.163@30.45,70.708
  Bottom Layer w0.2: v1(30.25,57.25) 34.425,57.25 34.575,57.4 U10.69@35.7,57.4
206_ADSTB16: U10.65 U11.166 | length 17.3
  Top Layer w0.2: U11.166@28.95,70.608 28.95,69.775 29,69.725 v1(29,60)
  Bottom Layer w0.2: v1(29,60) U10.65@35.7,60
206_AS: C8.1 U10.74 U11.161 | length 23.5
  Top Layer w0.2: v1(31.25,54) 31.25,69.45 31.45,69.65 U11.161@31.45,70.608
  Bottom Layer w0.2: v1(31.25,54) 34.25,54 34.4,54.15 C8.1@37.95,54.15
206_GATE2: U10.16 U11.134 | length 20
  Top Layer w0.2: v1(34.125,57.875) 35.15,56.85 U11.134@36.18,56.85
  Bottom Layer w0.2: U10.16@17.5,60 24.655,60 26.78,57.875 v1(34.125,57.875)
206_HLDA: U10.76 U11.162 U16.11 | length 61.1
  Top Layer w0.2: U11.162@30.95,70.608 30.95,69.65 30.9,69.6 30.9,54.75 30.75,54.6 30.75,46.475 33.15,44.075 33.15,41.325 34.125,40.35 34.125,35.5 32.5,33.875 v1(32.5,21.625)
  Bottom Layer w0.2: v1(30.75,53) 34.2,53 34.35,52.85 U10.76@35.7,52.85 ; v1(32.5,21.625) 34.925,21.625 35.76,20.79 U16.11@37.137,20.79
206_HRQ: U10.72 U11.150 | length 15.3
  Top Layer w0.2: v1(32.75,55.5) 32.55,55.7 32.55,63.65 33.75,64.85 U11.150@36.18,64.85
  Bottom Layer w0.2: v1(32.75,55.5) 34.35,55.5 34.4,55.45 U10.72@35.7,55.45
206_IRQ1: U10.94 U11.156 | length 30.5
  Top Layer w0.2: v1(32.2,50.775) 32.2,66.175 33.875,67.85 U11.156@36.18,67.85
  Bottom Layer w0.2: U10.94@24.325,47.325 24.325,49.25 25.85,50.775 v1(32.2,50.775)
206_IRQ13: U10.81 U11.11 | length 41.1
  Top Layer w0.2: U11.11@5.192,62.85 6.125,62.85 6.225,62.75 v1(16,62.75)
  MidLayer1 w0.2: v1(16,62.75) 16,50.25 17.025,49.225 31.55,49.225 v1(32.775,48)
206_OSCI: U10.75 U16.6 | length 43
  Top Layer w0.2: v1(35,53.5) 35,51.05 34,50.05 34,41.65 35.125,40.525 v1(35.125,18.25)
  MidLayer1 w0.2: v1(35.125,18.25) v1(42,18.25)
206_OUT1: U10.14 U11.182 | length 15.4
  Top Layer w0.2: U11.182@20.95,70.608 20.95,69.775 21,69.725 v1(21,58.75)
  Bottom Layer w0.203: U10.14@17.5,58.7 18.925,58.7 18.975,58.75 v1(21,58.75)
206_OUT2: U10.13 U11.184 | length 15.7
  Top Layer w0.2: U11.184@19.95,70.608 19.95,69.75 20.5,69.2 v1(20.5,58.25)
  Bottom Layer w0.203: U10.13@17.5,58.05 18.75,58.05 18.95,58.25 v1(20.5,58.25)
206_TMRCLK: U10.17 U11.135 | length 20
  Top Layer w0.2: v1(34.125,58.625) 35.4,57.35 U11.135@36.18,57.35
  Bottom Layer w0.2: U10.17@17.5,60.65 24.5,60.65 26.525,58.625 v1(34.125,58.625)
206_VCC: CV9.1 CV10.1 D3.K I2.22 R18.2 U10.26 U10.78 | length 60.4
  Top Layer w0.4: v2(14,48.425) v1(14,56) ; 14.025,54 19.75,54 ; v2(19.75,51.5) 19.75,54.575 23,57.825 v2(23,62.25)
  Bottom Layer w0.4: I2.22@10.1,49.25 11.85,49.25 12.675,48.425 v2(14,48.425) ; CV9.1@15.4,66.85 15.95,66.85 16.3,66.5 21.3,66.5 23,64.8 v2(23,62.25) ; v2(19.75,51.5) 34,51.5 34.05,51.55 37.05,51.55 37.45,51.15 CV10.1@39.3,51.15
308_KEYLOCK: R28.2 U11.51 | length 2.8
  Top Layer w0.203: v1(2.65,43.4) 3.25,43.4 3.8,42.85 U11.51@5.192,42.85
308_PIN46: U11.46 U18.1 | length 28.6
  Top Layer w0.2: v1(4,45.25) 4.375,45.25 4.475,45.35 U11.46@5.192,45.35 ; v1(6.75,19.75) U18.1@7.525,19.75
  MidLayer1 w0.2: v1(4,45.25) 6.125,43.125 6.125,21.625 6.75,21 v1(6.75,19.75)
308_X1: U11.157
308_X2: U3.8 U11.158 | length 57.1
  Top Layer w0.2: U11.158@32.95,70.608 32.95,68.35 31.75,67.15 31.75,46.1 33.575,44.275 33.575,41.5 34.625,40.45 v1(34.625,24.625)
  MidLayer1 w0.2: v1(25.75,26) 27.125,24.625 v1(34.625,24.625)
386/486: CN1.A14 JPx.2 | length 26.1
  Top Layer w0.2: v1(19.9,21.5) CN1.A14@19.9,28.85
  Bottom Layer w0.2: JPx.2@18.4,3.35 18.4,17.875 19.9,19.375 v1(19.9,21.5)
*CAS0: I3.8 U11.118 | length 10
  Top Layer w0.2: U11.118@35.7,48.85 39.25,48.85 39.75,49.35 I3.8@45.5,49.35
*CAS1: I3.49 U11.106 | length 6.6
  Top Layer w0.2: U11.106@35.7,42.85 38.2,42.85 40.2,44.85 I3.49@41.5,44.85
*CAS2: I3.44 U11.120 | length 5.8
  Top Layer w0.2: U11.120@35.7,49.85 I3.44@41.5,49.85
*CAS3: I3.4 U11.108 | length 10.4
  Top Layer w0.2: U11.108@35.7,43.85 38.65,43.85 40.15,45.35 I3.4@45.5,45.35
*MWE: I3.27 U11.155 | length 6
  Top Layer w0.2: U11.155@35.7,67.35 39.275,67.35 39.775,66.85 I3.27@41.5,66.85
*RAS0: I3.34 U11.140 | length 5.3
  Top Layer w0.2: U11.140@35.7,59.85 I3.34@41.05,59.85
*RAS1: I3.19 U11.141 | length 9.2
  Top Layer w0.2: U11.141@35.7,60.35 I3.19@44.9,60.35
CA1: CN1.A17 U11.93 | length 11.2
  Top Layer w0.2: v1(26,33.75) 26,36.3 27.95,38.25 U11.93@27.95,39.592
  MidLayer1 w0.2: v1@21.4,33.75 v1(26,33.75)
  other v1: 21.425,33.75
CA2: CN1.A19 U11.81 U12.48 | length 28.9
  Top Layer w0.2: v1(19.4,31.875) 19.4,35.25 21.95,37.8 U11.81@21.95,40.1
  MidLayer1 w0.2: v1(19.4,31.875) 37.515,31.875 U12.48@38.58,30.81
CA3: CN1.A13 U11.80 | length 11.7
  Top Layer w0.2: CN1.A13@18.9,29.45 18.9,35.25 21.45,37.8 U11.80@21.45,40.1
CA4: CN1.A12 U11.78 | length 11.7
  Top Layer w0.2: CN1.A12@17.9,29.45 17.9,35.25 20.45,37.8 U11.78@20.45,40.1
CA5: CN1.A21 U11.77 | length 7.7
  Top Layer w0.2: CN1.A21@17.4,33.45 17.4,35.25 19.95,37.8 U11.77@19.95,40.1
CA6: CN1.A11 U11.76 | length 11.7
  Top Layer w0.2: CN1.A11@16.9,29.45 16.9,35.25 19.45,37.8 U11.76@19.45,40.1
CA7: CN1.A22 U11.75 | length 7.7
  Top Layer w0.2: CN1.A22@16.4,33.45 16.4,35.25 18.95,37.8 U11.75@18.95,40.1
CA8: CN1.A10 U11.74 | length 11.7
  Top Layer w0.2: CN1.A10@15.9,29.45 15.9,35.25 18.45,37.8 U11.74@18.45,40.1
CA9: CN1.A23 U11.73 | length 7.7
  Top Layer w0.2: CN1.A23@15.4,33.45 15.4,35.25 17.95,37.8 U11.73@17.95,40.1
CA10: CN1.A24 U11.71 | length 7.7
  Top Layer w0.2: CN1.A24@14.4,33.45 14.4,35.25 16.95,37.8 U11.71@16.95,40.1
CA11: CN1.A8 U11.70 | length 11.7
  Top Layer w0.2: CN1.A8@13.9,29.45 13.9,35.25 16.45,37.8 U11.70@16.45,40.1
CA12: CN1.A25 U11.69 | length 7.7
  Top Layer w0.2: CN1.A25@13.4,33.45 13.4,35.25 15.95,37.8 U11.69@15.95,40.1
CA13: CN1.A7 U11.68 | length 11.7
  Top Layer w0.2: CN1.A7@12.9,29.45 12.9,35.25 15.45,37.8 U11.68@15.45,40.1
CA14: CN1.A26 U11.67 | length 7.7
  Top Layer w0.2: CN1.A26@12.4,33.45 12.4,35.25 14.95,37.8 U11.67@14.95,40.1
CA15: CN1.A6 U11.66 | length 11.7
  Top Layer w0.2: CN1.A6@11.9,29.45 11.9,35.25 14.45,37.8 U11.66@14.45,40.1
CA16: CN1.A27 U10.5 U11.65 | length 24.4
  Top Layer w0.2: CN1.A27@11.4,33.45 11.4,35.25 13.95,37.8 13.95,40.75 17.95,44.75 v1(19,44.75)
  Bottom Layer w0.2: U10.5@17.5,52.85 18.625,52.85 19,52.475 v1(19,44.75)
CA17: CN1.A5 U10.1 U11.64 | length 25.2
  Top Layer w0.2: CN1.A5@10.9,29.45 10.9,35.25 13.45,37.8 13.45,40.75 17.95,45.25 v1(18.5,45.25)
  Bottom Layer w0.2: U10.1@17.5,50.25 18.35,50.25 18.5,50.1 v1(18.5,45.25)
CA18: CN1.A28 U10.100 U11.63 | length 18.9
  Top Layer w0.2: CN1.A28@10.4,33.45 10.4,35.25 12.95,37.8 12.95,40.75 17.95,45.75 v1(20.4,45.75)
  Bottom Layer w0.2: v1(20.4,45.75) U10.100@20.4,46.75
CA19: CN1.A4 U10.99 U11.62 | length 23.3
  Top Layer w0.2: CN1.A4@9.9,29.45 9.9,35.25 12.45,37.8 12.45,40.75 17.95,46.25 v1(21.075,46.25)
CA20: CN1.A30 Q1.C U10.98 U11.59 | length 59.6
  Top Layer w0.2: CN1.A30@8.4,33.45 8.4,35.25 10.95,37.8 10.95,40.75 16.975,46.775 v1(21.725,46.775)
  MidLayer1 w0.2: v1(21.725,46.775) 35.85,46.775 v1(41,41.625)
  Bottom Layer w0.2: v1(41,41.625) 47.225,35.4 47.225,27.979 Q1.C@47.012,27.766
CA21: CN1.A2 U10.97 U11.58 | length 27
  Top Layer w0.2: CN1.A2@7.9,29.45 7.9,35.25 10.45,37.8 10.45,40.75 16.975,47.275 v1(22.375,47.275)
CA22: CN1.A31 U10.96 U11.57 | length 24.3
  Top Layer w0.2: CN1.A31@7.4,33.45 7.4,35.25 9.95,37.8 9.95,40.75 16.95,47.75 v1(23.025,47.75)
CA23: CN1.A1 U10.95 U11.56 U12.45 | length 63.4
  Top Layer w0.2: CN1.A1@6.9,29.45 6.9,35.25 9.45,37.8 9.45,40.75 16.975,48.275 v1(23.675,48.275)
  MidLayer1 w0.2: v1(9.45,38.25) 10.7,37 37.47,37 U12.45@41.12,33.35
CD0: CN1.16 I3.1 U11.101 U12.19 | length 101.4
  Top Layer w0.2: v1(28.5,17) 28.5,34.8 31.95,38.25 31.95,41.25 32,41.3 v1(32,41.625)
  Top Layer w0.203: v1(40,41.625) 40.725,42.35 I3.1@45.5,42.35
  MidLayer1 w0.2: v1(6.9,11) 12.9,17 56.475,17 57.375,16.1 57.375,12.125 56.875,11.625 54.955,11.625 U12.19@53.82,10.49
  Bottom Layer w0.203: v1(32,41.625) v1(40,41.625)
CD1: CN1.15 I3.51 U11.102 U12.20 | length 89.6
  Top Layer w0.2: v1(29,16.5) 29,34.8 32.45,38.25 32.45,40.75 32.5,40.8 v1(32.5,41.125) ; v1(39.5,41.125) 39.5,42.125 40.225,42.85 I3.51@41.5,42.85
  MidLayer1 w0.2: v1(7.9,11) 13.4,16.5 54.725,16.5 55.375,15.85 55.375,14.015 U12.20@56.36,13.03
  Bottom Layer w0.2: v1(32.5,41.125) v1(39.5,41.125)
CD2: CN1.14 I3.2 U11.103 U12.23 | length 88.9
  Top Layer w0.2: v1(29.5,14.5) 29.5,34.8 32.95,38.25 32.95,40.325 32.975,40.35 v1(32.975,40.625) ; v1(39,40.625) 39,42.125 40.225,43.35 I3.2@45.5,43.35
  MidLayer1 w0.2: v1(8.9,11) 12.4,14.5 52.75,14.5 U12.23@53.82,15.57
  Bottom Layer w0.2: v1(32.975,40.625) v1(39,40.625)
CD3: CN1.13 I3.50 U11.104 U12.8 | length 73.5
  Top Layer w0.2: v1(30,14) 30,34.8 33.45,38.25 U11.104@33.45,39.592 ; v1(38.5,40) 38.5,42.125 40.225,43.85 I3.50@41.5,43.85 ; U12.8@41.125,10.75 v1(41.125,14)
  MidLayer1 w0.2: v1(9.9,11) 12.9,14 v1(41.125,14)
  Bottom Layer w0.2: v1(33.625,40) v1(38.5,40)
CD4: CN1.12 I3.3 U11.105 U12.7 | length 83.8
  Top Layer w0.2: v1(41,4) U12.7@41,7.83 ; U12.7@41.12,7.95 40.125,8.945 40.125,37.62 36.18,41.565 U11.105@36.18,42.35 38.225,42.35 40.225,44.35 I3.3@45.5,44.35
  MidLayer1 w0.2: v1(10.9,11) 14.9,7 27.6,7 31.1,3.5 40.5,3.5 v1(41,4)
CD5: CN1.11 I3.48 U11.109 U12.6 | length 78.5
  Top Layer w0.2: v1(37.5,4) 37.5,8.65 38.58,9.73 U12.6@38.58,10.49 39.625,11.535 39.625,37.625 35.125,42.125 35.125,44.15 35.325,44.35 38.6,44.35 40.1,45.85 I3.48@41.5,45.85
  MidLayer1 w0.2: v1(11.9,11) 15.4,7.5 27.65,7.5 31.15,4 v1(37.5,4)
CD6: CN1.10 I3.5 U11.110 U12.3 | length 79.1
  Top Layer w0.2: v1(36,4.5) 36.04,4.54 U12.3@36.04,7.95 37.625,9.535 37.625,39.125 34.775,41.975 34.775,44.4 35.225,44.85 38.55,44.85 40.05,46.35 I3.5@45.5,46.35
  MidLayer1 w0.2: v1(12.9,11) 15.9,8 27.7,8 31.2,4.5 v1(36,4.5)
CD7: CN1.9 I3.47 U11.111 U12.2 | length 71.7
  Top Layer w0.2: v1(32.5,5) 32.5,9.49 37.125,14.115 37.125,39.125 34.425,41.825 34.425,44.625 35.15,45.35 38.5,45.35 40,46.85 I3.47@41.5,46.85
  MidLayer1 w0.2: v1(13.9,11) 16.4,8.5 27.8,8.5 31.3,5 v1(32.5,5)
CD8: CN1.8 I3.6 U11.113 U12.24 | length 98.9
  Top Layer w0.2: U11.113@36.18,46.35 38.95,46.35 39.95,47.35 46.875,47.35 47.2,47.025 47.2,37 44.75,34.55 v1(44.75,5.5) ; v1(44.4,19.125) 44.725,19.125
  MidLayer1 w0.2: v1(14.9,11) 16.9,9 27.85,9 31.35,5.5 v1(44.75,5.5) ; v1(44.4,19.125) 55.345,19.125 U12.24@56.36,18.11
CD9: CN1.7 I3.46 U11.115 U12.28 | length 97.1
  Top Layer w0.2: U11.115@36.18,47.35 39.4,47.35 39.9,47.85 47.075,47.85 47.55,47.375 47.55,36.8 45.25,34.5 v1(45.25,6)
  MidLayer1 w0.2: v1(15.9,11) 17.4,9.5 27.9,9.5 31.4,6 v1(45.25,6) ; v1(45.25,22.125) 55.295,22.125 U12.28@56.36,23.19
CD10: CN1.6 I3.7 U11.116 U12.29 | length 92.7
  Top Layer w0.2: U11.116@36.18,47.85 39.35,47.85 39.85,48.35 47.15,48.35 47.9,47.6 47.9,36.375 47.25,35.725 v1(47.25,6.5)
  MidLayer1 w0.2: v1(16.9,11) 17.9,10 27.95,10 31.45,6.5 v1(47.25,6.5) ; v1@47.25,22.65 48.775,22.65 49.375,23.25 53.76,23.25 U12.29@53.82,23.19
  other v1: 47.25,22.625
CD11: CN1.5 I3.45 U11.117 U12.30 | length 88.5
  Top Layer w0.2: U11.117@36.18,48.35 39.3,48.35 39.8,48.85 47.375,48.85 48.25,47.975 48.25,36.025 47.75,35.525 v1(47.75,12)
  MidLayer1 w0.2: v1(17.9,11) 19.4,12.5 28.25,12.5 28.75,12 v1(47.75,12) ; v1(47.75,24.75) 55.38,24.75 U12.30@56.36,25.73
CD12: CN1.4 I3.9 U11.121 U12.16 | length 87.5
  Top Layer w0.2: U11.121@35.7,50.35 I3.9@45.5,50.35 46.775,50.35 51.25,45.875 51.25,41.875 49.75,40.375 49.75,12.02 U12.16@51.28,10.49
  MidLayer1 w0.2: v1(18.9,11) 19.9,12 28.1,12 28.6,11.5 50.27,11.5 U12.16@51.28,10.49
CD13: CN1.3 I3.43 U11.122 U12.15 | length 90.7
  Top Layer w0.2: U11.122@35.7,50.85 I3.43@40.9,50.85 ; I3.43@41.5,50.85 46.9,50.85 51.61,46.14 51.61,41.685 50.25,40.325 50.25,13.4 52.25,11.4 52.25,8.92 U12.15@51.28,7.95
  MidLayer1 w0.2: v1(19.9,11) 20.4,10.5 28.003,10.5 31.503,7 50.33,7 U12.15@51.28,7.95
CD14: CN1.2 I3.10 U11.123 U12.12 | length 90.2
  Top Layer w0.2: U11.123@35.7,51.35 I3.10@45.5,51.35 47.05,51.35 51.96,46.44 51.96,41.385 50.85,40.275 50.85,36.45 52.375,34.925 52.375,12 52.75,11.625 v1(52.75,9.5)
  MidLayer1 w0.2: v1(20.9,11) 21.4,11.5 28.05,11.5 30.05,9.5 45.21,9.5 U12.12@46.2,10.49 47.19,9.5 v1(52.75,9.5)
CD15: CN1.1 I3.42 U11.124 U12.11 | length 92.6
  Top Layer w0.2: U11.124@35.7,51.85 I3.42@40.7,51.85
  Top Layer w0.203: I3.42@41.5,51.85 47.125,51.85 52.318,46.657 52.318,41.118 51.325,40.125 51.325,36.575 52.875,35.025 52.875,12.5 53.75,11.625 54.5,11.625 54.875,11.25 v1(54.875,9)
  MidLayer1 w0.2: v1(21.9,11) 28,11 30,9 45.15,9 U12.11@46.2,7.95 47.25,9 v1(54.875,9)
CPU_*ADS: CN1.26 U11.99 U12.47 | length 59.1
  Top Layer w0.2: v1(16.4,5) 24.775,5 28,8.225 28,35.3 30.95,38.25 U11.99@30.95,39.592 ; v1(16.4,6.5) CN1.26@16.4,7.325
  MidLayer1 w0.2: v1(28,34.875) 37.055,34.875 U12.47@38.58,33.35
  Bottom Layer w0.2: v1(16.4,5) v1(16.4,6.5)
CPU_*BHE: CN1.28 U11.94 | length 38
  Top Layer w0.2: CN1.28@18.4,7.85 18.4,9.475 18.925,10 22.525,10 22.75,10.225 22.75,13.2 26.5,16.95 26.5,36.3 28.45,38.25 U11.94@28.45,39.592
CPU_*BLE: CN1.27 U11.95 | length 44
  Top Layer w0.2: CN1.27@17.4,7.85 17.4,6.35 17.75,6 24.225,6 27,8.775 27,36.3 28.95,38.25 U11.95@28.95,39.592
CPU_*BUSY: CN1.A20 U11.89 | length 11.6
  Top Layer w0.2: CN1.A20@18.4,34.35 v1(18.4,34.75) ; v1(24,34.75) 24,36.35 25.95,38.3 U11.89@25.95,39.592
  MidLayer1 w0.2: v1(18.4,34.75) v1(24,34.75)
CPU_*READY: CN1.21 U11.98 U12.49 | length 60.5
  Top Layer w0.2: CN1.21@11.4,7.85 11.4,6.225 12.125,5.5 24.475,5.5 27.5,8.525 27.5,35.3 30.45,38.25 U11.98@30.45,39.592
  MidLayer1 w0.2: v1(27.508,34.383) 35.007,34.383 U12.49@36.04,33.35
CPU_D/*C: CN1.A29 U10.61 U11.91 | length 53.5
  Top Layer w0.2: v1(25,34.25) 25,36.35 26.95,38.3 26.95,40.5 27,40.55 v1(27,62.25)
  MidLayer1 w0.2: v1(9.4,34.25) v1(25,34.25)
  Bottom Layer w0.2: v1(27,62.25) 28.775,62.25 29.075,61.95 33.875,61.95 34.525,62.6 U10.61@35.7,62.6
CPU_HLDA: CN1.30 U11.45 | length 56.3
  Top Layer w0.2: v1(3.5,45.75) 4.325,45.75 4.425,45.85 U11.45@5.192,45.85 ; v1(20.4,6.5) CN1.30@20.4,7.85
  MidLayer1 w0.2: v1(3.5,45.75) 3.5,44.95 5.625,42.825 5.625,19.35 7.475,17.5 v1(19.4,17.5)
  Bottom Layer w0.2: v1(19.4,17.5) 19.4,9.775 20.4,8.775 v1(20.4,6.5)
CPU_HOLD: CN1.31 U18.4 | length 22.1
  Top Layer w0.2: U18.4@10,17.8 10.875,17.8 12.675,16 v1(21.4,16) ; v1(21.4,6.5) CN1.31@21.4,7
  Bottom Layer w0.2: v1(21.4,6.5) v1(21.4,16)
CPU_INTR: CN1.29 U10.73 | length 90.1
  Top Layer w0.2: v1(19.375,4.5) 8.525,4.5 5.25,7.775 5.25,40.05 6.2,41 9.175,41 16.825,48.65 20.025,48.65 21.75,50.375 v1(21.75,55) ; v1(19.375,6.5) CN1.29@19.375,7.4
  Bottom Layer w0.2: v1(19.375,4.5) v1(19.375,6.5) ; v1(21.75,55) 34.225,55 34.425,54.8 U10.73@35.7,54.8
CPU_M/*IO: CN1.A3 U11.92 U12.44 | length 46.8
  Top Layer w0.2: v1(24,29.875) 24,33.25 24.25,33.5 25,33.5 25.5,34 25.5,36.35 27.45,38.3 U11.92@27.45,39.592
  MidLayer1 w0.2: v1@9,30.375 9.35,30.375 9.85,29.875 42.725,29.875 U12.44@43.66,30.81
  other v1: 9.1,30.375
CPU_NMI: CN1.A18 U11.83 | length 7.7
  Top Layer w0.2: CN1.A18@20.4,33.45 20.4,35.25 22.95,37.8 U11.83@22.95,40.1
CPU_PEREQ: CN1.A16 U11.88 | length 12.5
  Top Layer w0.2: CN1.A16@21.9,29.45 v1(21.9,35.25) ; v1(23.5,35.25) 23.5,36.35 25.45,38.3 U11.88@25.45,39.592
  MidLayer1 w0.2: v1(21.9,35.25) v1(23.5,35.25)
CPU_RESET: CN1.A15 U11.84 | length 11.7
  Top Layer w0.2: CN1.A15@20.9,29.45 20.9,35.25 23.45,37.8 U11.84@23.45,40.1
CPU_W/*R: CN1.A9 U10.62 U11.90 U12.41 | length 74.4
  Top Layer w0.2: CN1.A9@14.9,29.45 v1(14.9,31.875) ; v1(23.5,32.375) 23.5,33.35 24.5,34.35 24.5,36.35 26.45,38.3 26.45,40.475 26.5,40.525 v1(26.5,61.75)
  MidLayer1 w0.2: v1(14.9,31.875) 15.4,32.375 45.225,32.375 U12.41@46.2,33.35
  Bottom Layer w0.2: v1(26.5,61.75) 28.7,61.75 28.85,61.6 34.025,61.6 34.375,61.95 U10.62@35.7,61.95
D245_*OE: U11.149 UD1.19 | length 23.1
  Top Layer w0.2: U11.149@36.18,64.35 43.625,64.35 44.125,64.85 47.4,64.85 47.75,65.2 v1(47.75,72.125)
  Bottom Layer w0.2: UD1.19@43.8,71.35 46.175,71.35 46.95,72.125 v1(47.75,72.125)
D245_DIR: U11.185 UD1.1 | length 35.9
  Top Layer w0.2: v1(19,74) 19,72.575 19.5,72.075 19.5,71.35 19.45,71.3 U11.185@19.45,70.608
  Bottom Layer w0.2: v1(19,74) 19.225,74.225 46.55,74.225 48.775,72 UD1.1@50.3,72
DRAM_DP0: U11.112
DRAM_DP1: U11.125
FS0: R5.1 U3.1 | length 2.9
  Top Layer w0.2: R5.1@15.575,26.625 16.575,26.625 17.2,26 U3.1@18.254,26
FS1: R1.1 U3.5 | length 12.5
  MidLayer1 w0.2: v1(15.55,24.9) 22.07,18.38 v1(25.366,18.38)